# EAGLE board red (EAGLE 9.5.1)
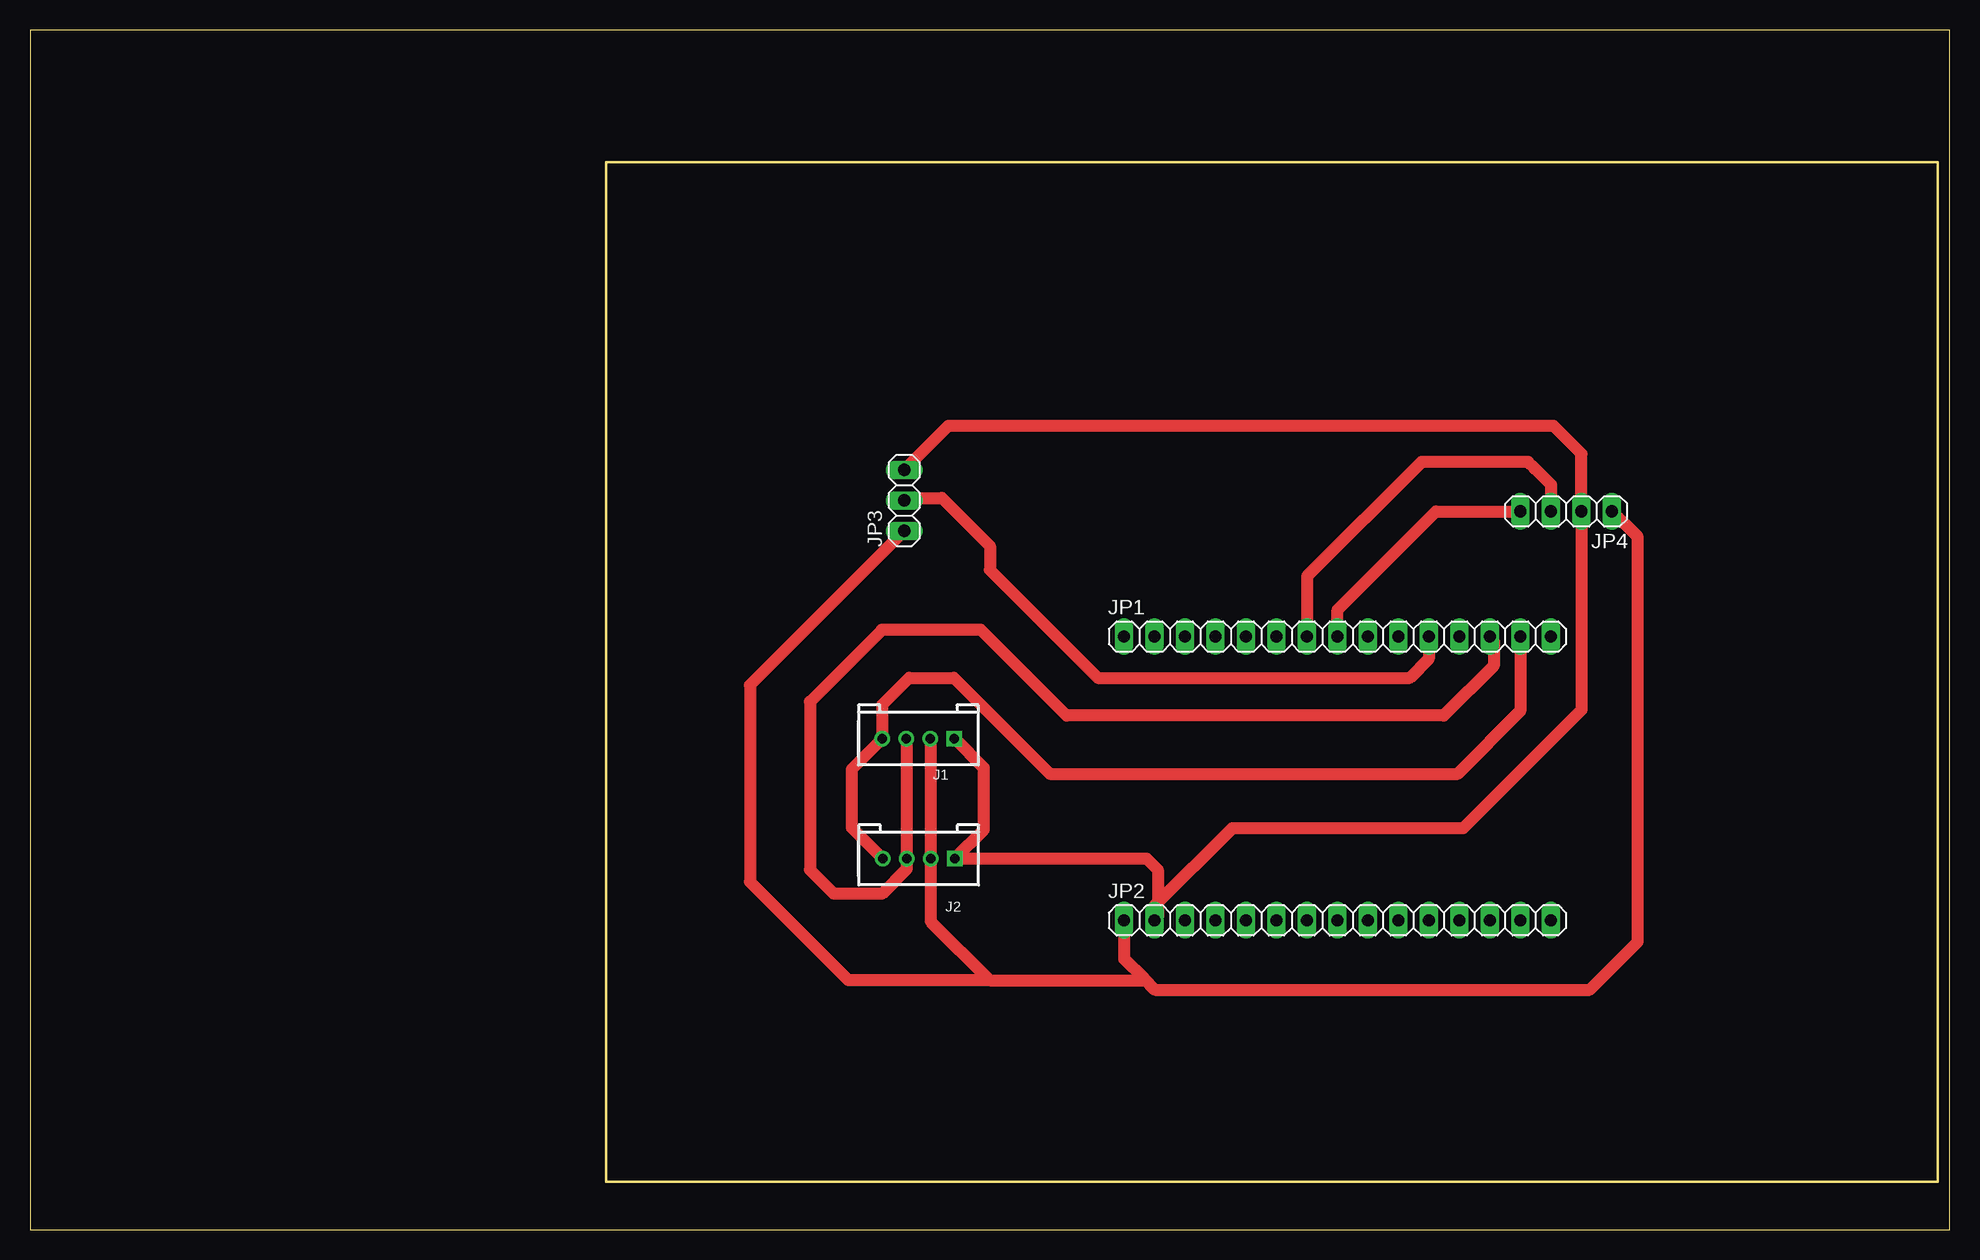
[diagram p0: board, top side]
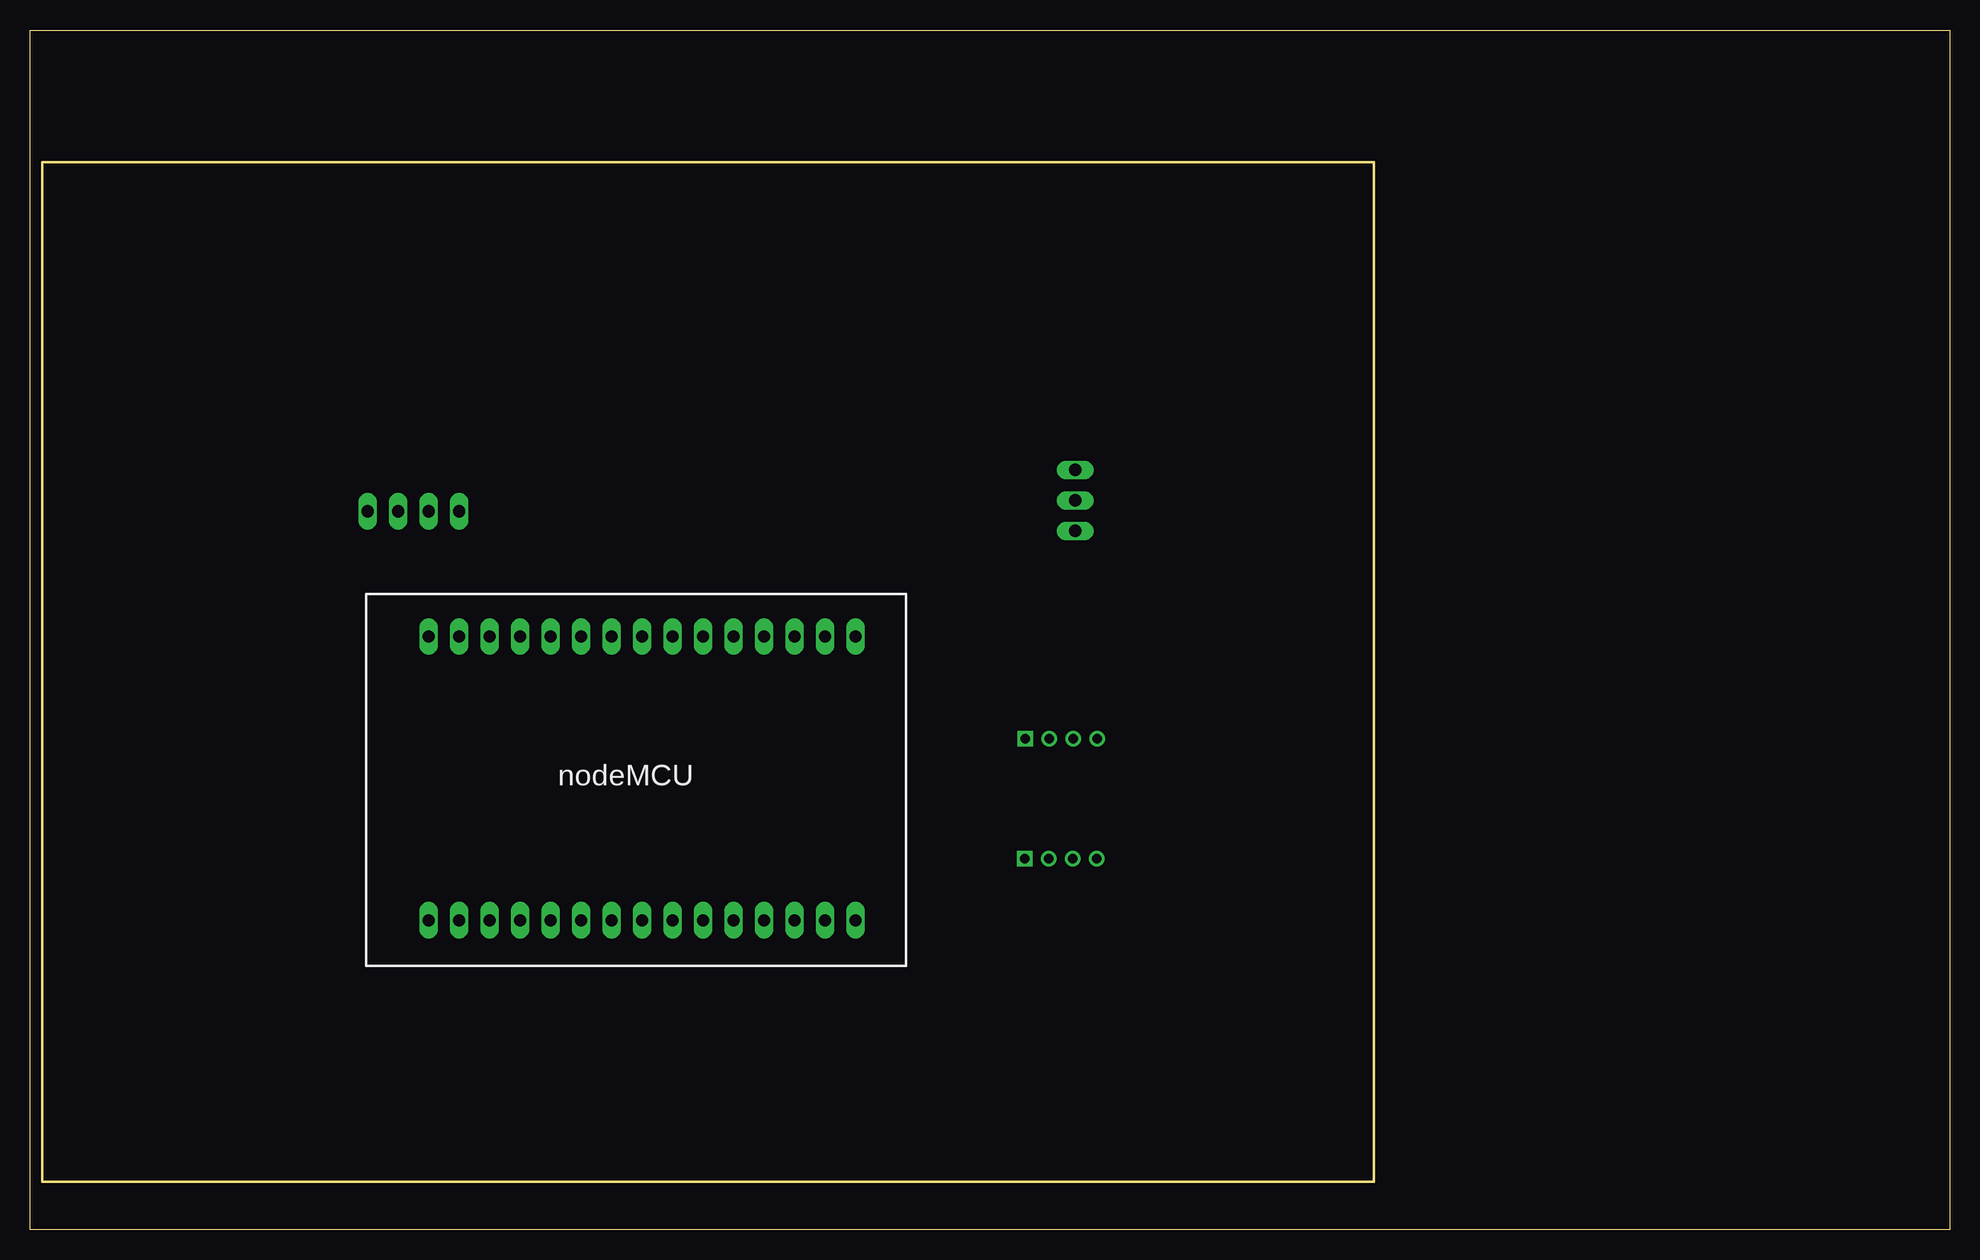
[diagram p1: board, bottom side, seen from below]

Size 160 x 100 mm. Coordinates in mm from the lower left corner, seen from the top.
Outline: 0,0 160,0 160,100 0,100 0,0
Outline: 48,4 48,89 159,89 159,4 48,4
Copper layers (1*16): Top 0.035mm / dielectric 1.5mm / Bottom 0.035mm
Design rules "default": minimum track width 6mil, minimum drill 0.35mm, track to track 6mil, track to pad 6mil, pad to pad 6mil, via to via 6mil, smd to smd 6mil, copper to edge 40mil, drill to drill 6mil, minimum pad ring 10mil, minimum via ring 8mil, stop-mask expansion 4mil, vias tented up to drill 0mil, thermal gap 10mil

## Footprints (pad centres in the part's own frame; a part is rotated, then mirrored left to right if it is on the bottom)
HW4-2.0 = drill 0.8 pad 1.27 square: 1 -3,0 | drill 0.8 pad 1.27: 2 -1,0; 3 1,0; 4 3,0
1X15 = drill 1.016 long: 1 -17.78,0; 2 -15.24,0; 3 -12.7,0; 4 -10.16,0; 5 -7.62,0; 6 -5.08,0; 7 -2.54,0; 8 0,0; 9 2.54,0; 10 5.08,0; 11 7.62,0; 12 10.16,0; 13 12.7,0; 14 15.24,0; 15 17.78,0
1X03 = drill 1.016 long: 1 -2.54,0; 2 0,0; 3 2.54,0
1X04 = drill 1.016 long: 1 -3.81,0; 2 -1.27,0; 3 1.27,0; 4 3.81,0

## Placement (x,y rotation side)
J1  4P-2.0  [HW4-2.0]  74.05,40.92 180 top
J2  4P-2.0  [HW4-2.0]  74.08,30.92 180 top
JP1  [1X15]  108.98,49.43 0 top
JP2  [1X15]  108.98,25.78 0 top
JP3  [1X03]  72.87,60.79 90 top
JP4  [1X04]  128.05,59.87 180 top

## Library data of the parts
J1 J2 = OPL_Connector
JP1-JP4 = pinhead

## Nets
N$3: JP1.11 JP3.2
N$4: JP1.8 JP4.4
N$5: JP1.7 JP4.3
N$6: J1.2 J2.2 JP2.1 JP3.1 JP4.1
N$7: J1.4 J2.4 JP1.14
N$8: J1.3 J2.3 JP1.13
N$9: J1.1 J2.1 JP2.2 JP3.3 JP4.2

## Tracks (layer width: path | path; a pad name or v marks a point on that pad's centre or on a via)
N$3
  Top 1: JP1.11 116.6,47.6 115,46 89,46 80,55 80,57 76,61 73.08,61 JP3.2
N$4
  Top 1: JP4.4 117.2,59.87 108.98,51.65 JP1.8
N$5
  Top 1: JP1.7 106.44,54.44 116,64 124.87,64 125.44,63.44 125.65,63.22 126.78,62.09 JP4.3
N$6
  Top 1: 80,20.78 68.22,20.78 60,29 60,45.38 JP3.1 | 92.88,20.88 93.76,20 130,20 134,24 134,57.73 JP4.1 | 92.88,20.88 91.2,22.56 JP2.1 | J1.2 75.05,30.95 J2.2 75.08,25.7 80,20.78 | 92.88,20.88 92.78,20.78 80,20.78
N$7
  Top 1: J2.4 68.48,33.52 68.48,38.35 J1.4 71.05,43.77 73.28,46 77,46 85,38 119,38 124.22,43.22 JP1.14
N$8
  Top 1: J1.3 73.08,40.89 J2.3 73.08,30.08 71,28 67,28 65,30 65,44 71,50 79.25,50 86.41,42.85 117.85,42.85 122,47 122,49.11 JP1.13
N$9
  Top 1: J1.1 79.48,38.49 79.48,33.32 J2.1 93.08,30.92 94,30 94,26.04 JP2.2 93.74,27 100.22,33.48 119.48,33.48 129.32,43.32 JP4.2 129.32,64.68 127,67 76.54,67 JP3.3

## Text on the board
bNames: nodeMCU